# Altium PCB QuadraticConverterPCB.PcbDoc
Units mil, origin at the board's own origin, x right, y up, seen from the top; angles counter-clockwise.
Board outline 6560 x 5010 mil, 2 copper layers (Top Layer, Bottom Layer); 25 components, 8 nets, 94 pads, 0 vias.
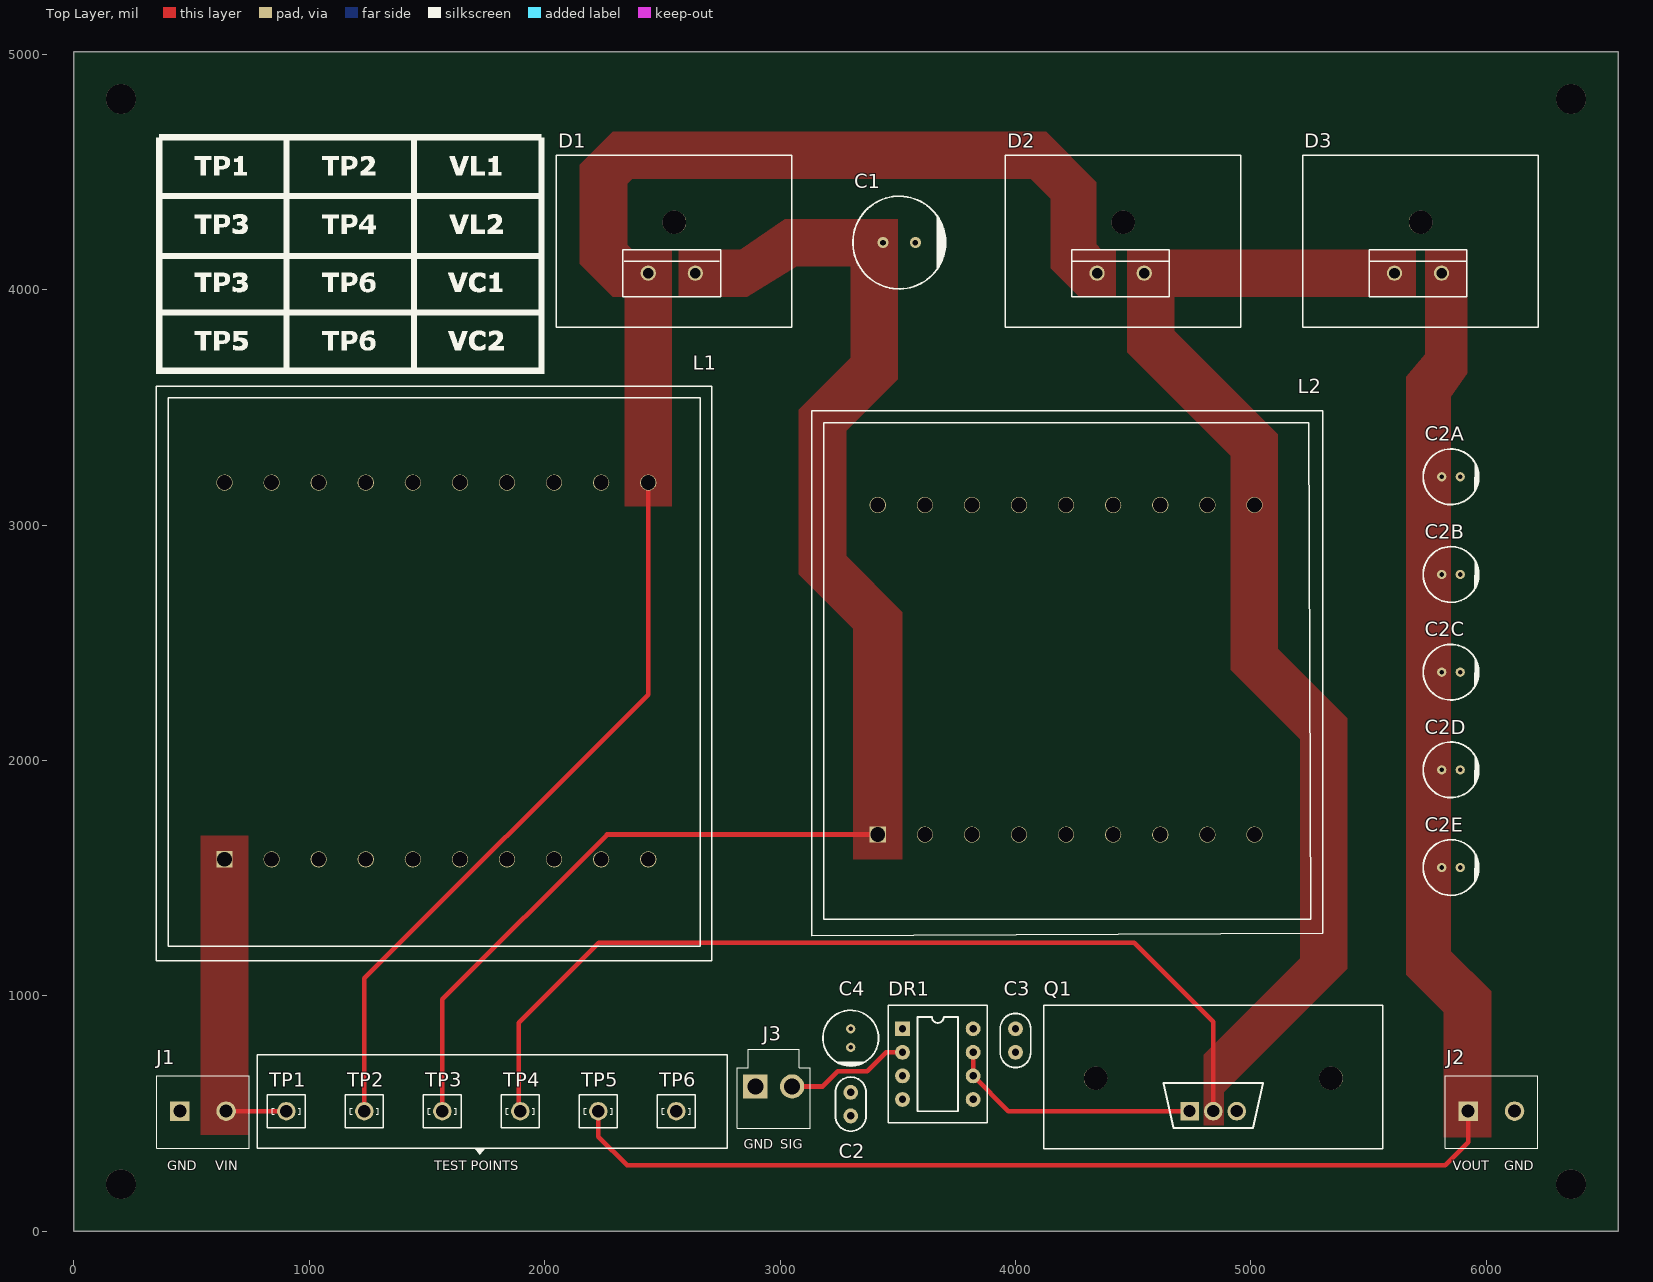
[diagram p0: Top Layer view]
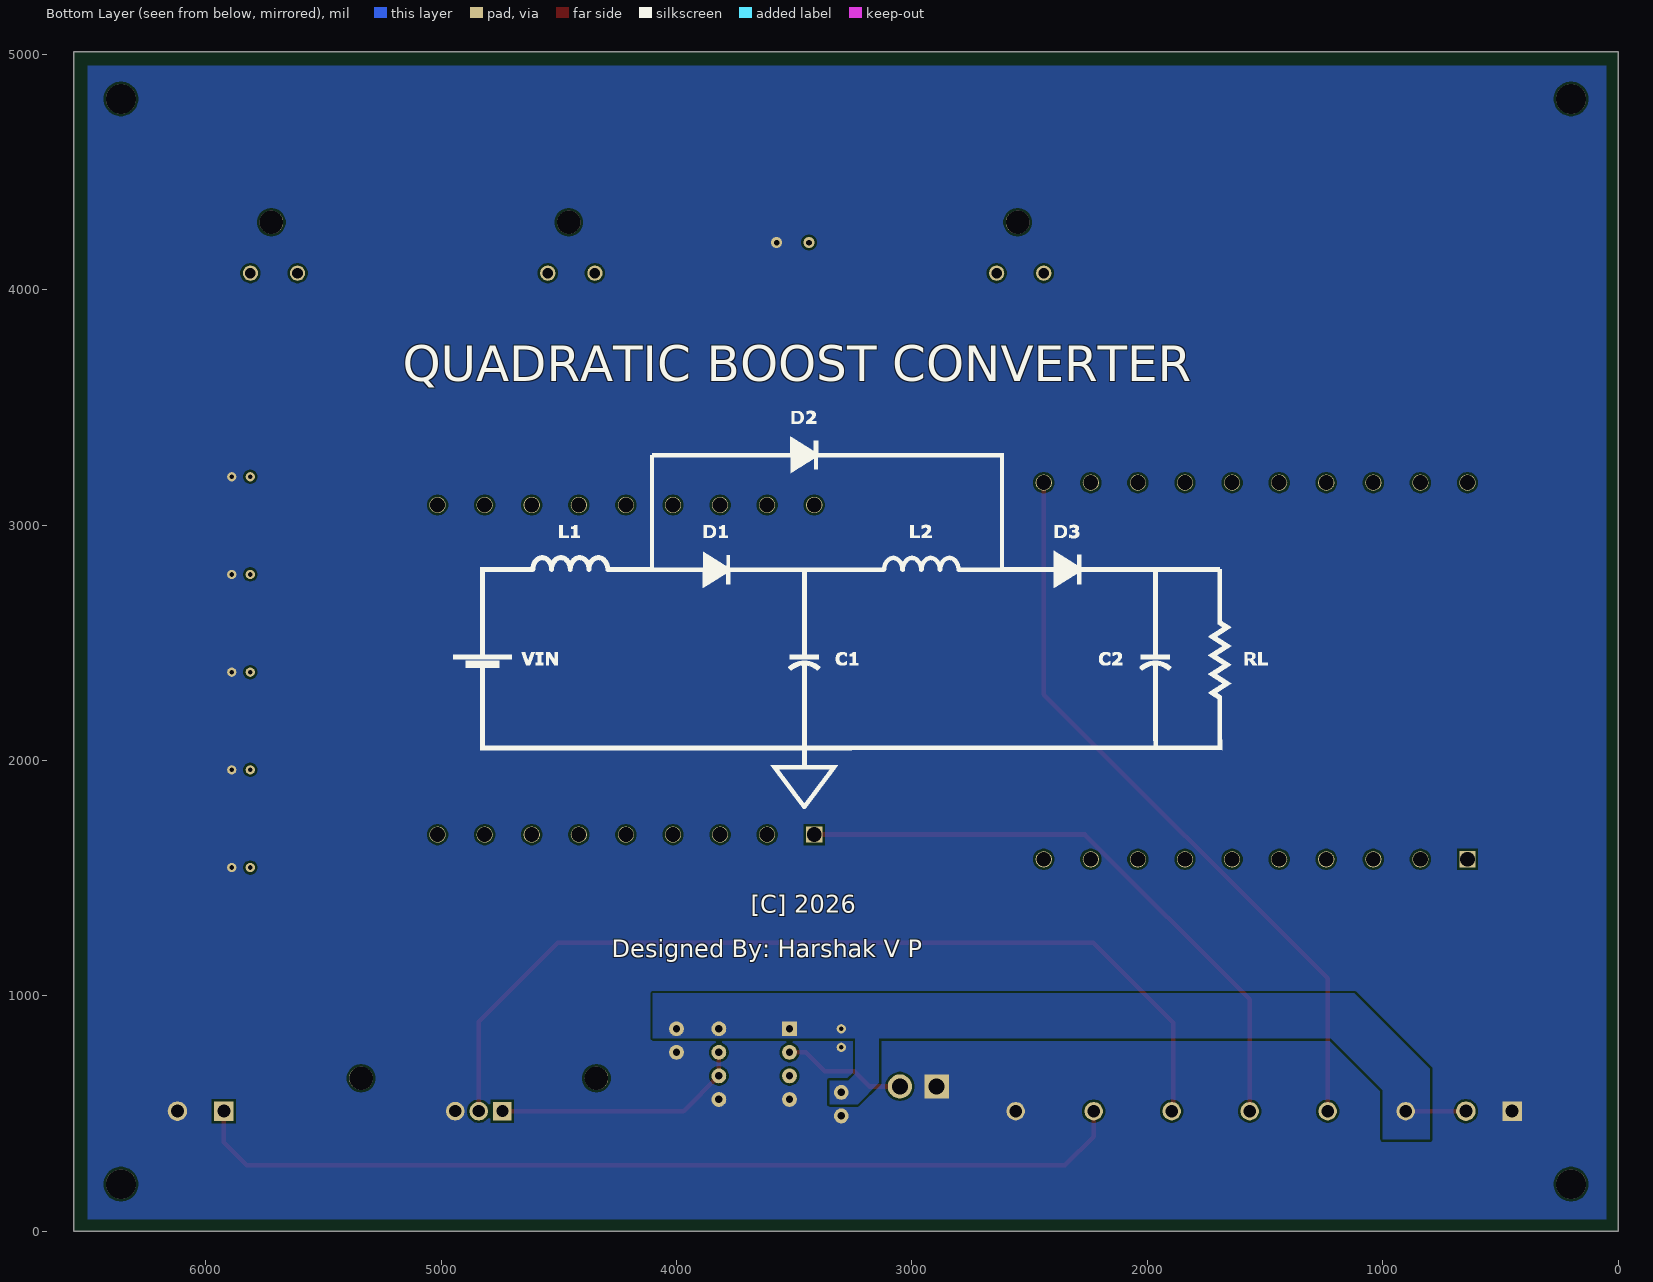
[diagram p1: Bottom Layer view, seen from below]
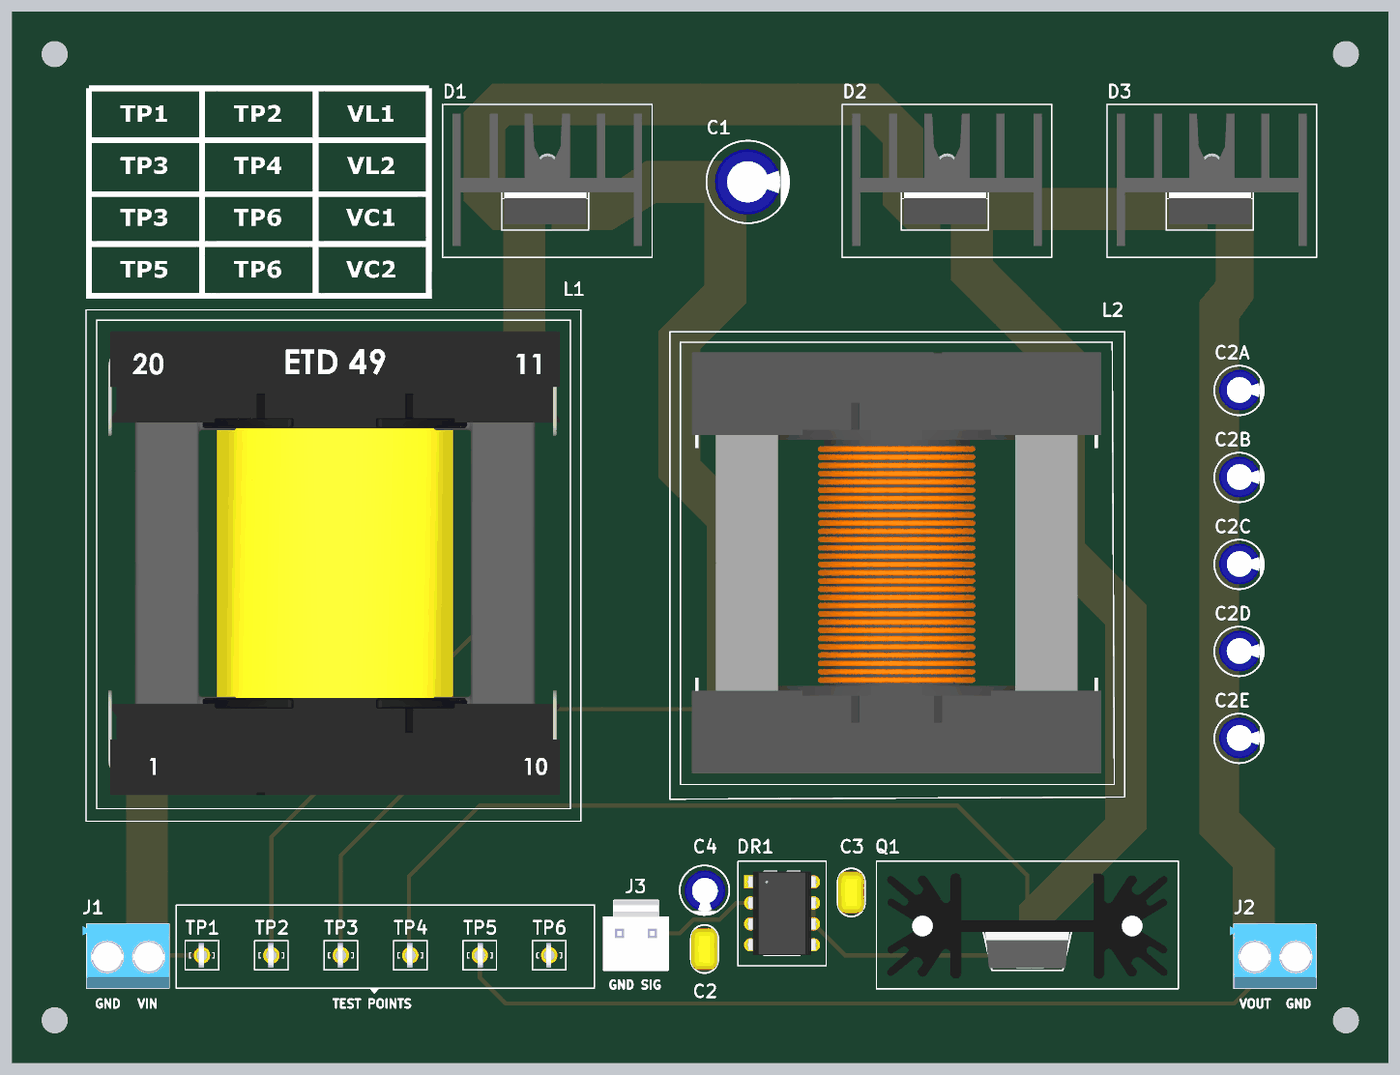
[diagram p2: 3D render of the assembled board from above, using the file's embedded part models]

## Layer stack, top to bottom
Top Solder: solder mask 0.4, Solder Resist, Dk 3.5
Top Layer: signal copper 1.4
Dielectric 1: dielectric 12.6, FR-4, Dk 4.8
Bottom Layer: signal copper 1.4
Bottom Solder: solder mask 0.4, Solder Resist, Dk 3.5

## Board outline
0,0 0,5010 6560,5010 6560,0

## Design rules (kind name [scope] priority, off if disabled: settings)
Clearance [All] p1: gap=10 ignorepadtopadclearanceinfootprint=FALSE
Height [All] p1: minheight=0 maxheight=5000 prefheight=2500
HoleSize [All] p1: absolutevalues=TRUE maxlimit=150 minlimit=1 maxpercent=80.000 minpercent=20.000
PolygonConnect [All] p1: connectstyle=Direct reliefconductorwidth=10 reliefentries=4 polygonreliefangle="90 Angle" airgapwidth=10
RoutingVias [All] p1: holewidth=28 width=50 viastyle="Through Hole" minholewidth=28 minwidth=50 maxholewidth=28 maxwidth=50
SolderMaskExpansion [All] p1: expansion=0 istentingtop=FALSE
SupplyNets "Schematic Supply Nets_1" [InNet('GND')] p1: voltage=0.000
SupplyNets "Schematic Supply Nets" [InNet('+12V')] p2: voltage=0.000
Width [All] p1: maxlimit=200 minlimit=10 preferedwidth=50
28 further rules are at their usual default settings.

## Classes and differential pairs
component class QuadraticConverterSch: C1 C2 C2A C2B C2C C2D C2E C3 C4 D1 D2 D3 DR1 J1 J2 J3 L1 L2 Q1 TP1 TP2 TP3 TP4

## Components (designator, comment, footprint, x,y, rotation, side; value= is the part's Value field where it differs from the comment)
C1 "100uF, 50V" CAP_G3 3575,4200 r180 top locked
C2 "0.1uF, 25V" CAP_CER 3300,490 r90 top locked value=100nF
C2A "22uF, 50V" CAP_C3 5850,3205 r180 top locked value=22µF
C2B "22uF, 50V" CAP_C3 5850,2790 r180 top locked value=22µF
C2C "22uF, 50V" CAP_C3 5850,2375 r180 top locked value=22µF
C2D "22uF, 50V" CAP_C3 5850,1960 r180 top locked value=22µF
C2E "22uF, 50V" CAP_C3 5850,1545 r180 top locked value=22µF
C3 "0.1uF, 25V" CAP_CER 4000,760 r90 top locked value=100nF
C4 "4.7uF, 16V" CAP_C3 3300,820.63 r90 top locked
D1 "100V, 15A" TO-220AC_ONS 2440,4070 r0 top locked
D2 "100V, 15A" TO-220AC_ONS 4346.67,4070 r0 top locked
D3 "100V, 15A" TO-220AC_ONS 5610,4070 r0 top locked
DR1 "TC4420EPA" TC4420EPA 3520,860 r0 top locked
J1 "TB003-500-P02BE" CUI_TB003-500-P02BE 450,510 r0 top
J2 "TB003-500-P02BE" CUI_TB003-500-P02BE 5923.15,510 r0 top locked
J3 "B2P-VH" JST_B2P-VH(LF)(SN) 2972.95,615 r0 top locked
L1 "B66368B1020T001" ETD49 640,1580 r90 top locked
L2 "B66368B1020T001" ETD44 3415,1685 r90 top locked
Q1 "100V, 57A" FP-PG-TO220-3-MFG 4740,510 r90 top locked value=23MΩ
TP1 "4952" KEYSTONE_4952 902.5,510 r0 top locked
TP2 "4952" KEYSTONE_4952 1233.82,510 r0 top locked
TP3 "4952" KEYSTONE_4952 1565.13,510 r0 top locked
TP4 "4952" KEYSTONE_4952 1896.45,510 r0 top locked
TP5 "4952" KEYSTONE_4952 2227.77,510 r180 top locked
TP6 "4952" KEYSTONE_4952 2559.08,510 r0 top locked

## Footprints (in the part's own frame and the unit in brackets; to place one, negate y for a bottom-side part, rotate by r counter-clockwise, add the part's x,y. Pads: shape width x height; smd on the part's side, far side on the other; paste and mask are expansions set on the pad)
CAP_C3 [mm]
  round 1 hole 0.5: 1(-1,0) 2(1,0)
  silkscreen extent -3,-3 3,3, body extent -2.56,-2.55 2.43,2.45, height 12.5
CAP_CER [mm]
  round 1.6 hole 0.8: 1(0,0) 2(2.54,0)
  silkscreen extent -1.65,-1.65 4.19,1.65, body extent -1.27,-1.59 3.81,1.59, height 6.34
CAP_G3 [mm]
  round 1.2 hole 0.6: 1(0,0) 2(3.5,0)
  silkscreen extent -3.25,-5 6.75,5, body extent -2.25,-4 5.75,4, height 12.5
CUI_TB003-500-P02BE [mm]
  rect 2.1x2.1 / inner round 2.1 / far side rect 2.1x2.1 hole 1.4 mask+0.102: 1(0,0)
  round 2.1 hole 1.4 mask+0.102: 2(5,0)
  silkscreen extent -2.5,-4 7.5,3.8, body extent -2.96,-3.99 7.54,3.81, height 10.3
ETD44 [mm]
  rect 1.75x1.75 hole 1.6: 1(0,0)
  round 1.75 hole 1.6: 2(0,-5.08) 3(0,-10.16) 4(0,-15.24) 5(0,-20.32) 6(0,-25.4) 7(0,-30.48) 8(0,-35.56) 9(0,-40.64) 10(35.56,-40.64) 11(35.56,-35.56) 12(35.56,-30.48) 13(35.56,-25.4) 14(35.56,-20.32) 15(35.56,-15.24) 16(35.56,-10.16) 17(35.56,-5.08) 18(35.56,0)
  silkscreen extent -10.92,-48.01 45.72,7.11, body extent -7.77,-45.16 43.23,4.45, height 38.11
ETD49 [mm]
  rect 1.75x1.75 hole 1.6: 1(0,0)
  round 1.75 hole 1.6: 2(0,-5.08) 3(0,-10.16) 4(0,-15.24) 5(0,-20.32) 6(0,-25.4) 7(0,-30.48) 8(0,-35.56) 9(0,-40.64) 10(0,-45.72) 11(40.64,-45.72) 12(40.64,-40.64) 13(40.64,-35.56) 14(40.64,-30.48) 15(40.64,-25.4) 16(40.64,-20.32) 17(40.64,-15.24) 18(40.64,-10.16) 19(40.64,-5.08) 20(40.64,0)
  silkscreen extent -10.92,-52.58 51.05,7.37, body extent -7.77,-50.03 48.44,4.67, height 40.57
FP-PG-TO220-3-MFG [mm]
  rect 2x2 hole 1.3 paste-2539.97 mask+0: 1(0,0)
  round 2 hole 1.3 paste-2539.97 mask+0: 2(0,-2.54) 3(0,-5.08)
  round 2.54 hole 2.54 unplated: 4(3.556,-15.24) 5(3.556,10.16)
  silkscreen extent -4.06,-20.83 11.43,15.75, body extent -2.84,-19.55 9.95,14.47, height 63.51
JST_B2P-VH(LF)(SN) [mm]
  rect 2.625x2.625 / inner round 2.625 / far side rect 2.625x2.625 hole 1.75: 1(-1.98,0)
  round 2.625 hole 1.75: 2(1.98,0)
  silkscreen extent -3.93,-4.5 3.93,4, body extent -3.93,-4.5 3.93,4, height 10.9
KEYSTONE_4952 [mm]
  round 1.98 hole 1.32: TP(0,0)
  silkscreen extent -2.03,-1.78 2.03,1.78, body extent -0.38,-1.5 0.25,1.5, height 6.3
TC4420EPA [mm]
  rect 1.6x1.6 hole 0.8: 1(0,0)
  round 1.6 hole 0.8: 2(0,-2.54) 3(0,-5.08) 4(0,-7.62) 5(7.62,-7.62) 6(7.62,-5.08) 7(7.62,-2.54) 8(7.62,0)
  silkscreen extent -1.52,-10.16 9.14,2.54, body extent -0.25,-8.89 7.87,1.27, height 5.46
TO-220AC_ONS [mil]
  round 65 / inner round 60 / far side round 65 hole 45 paste-99999 mask+0: 1(0,0) 2(200,0)
  round 100 hole 100 unplated: 5(111,216)
  silkscreen extent -390,-230 610,500, body extent -343,-175 563,455, height 985

## Part data
C1: library part SK107M050AG3AAKPLP, "CAP ALUM 100UF 20% 50V RADIAL TH", Case/Package=Radial, Manufacturer="Yageo Group", Supplier Part Number=399-6105-ND, Tolerance=20%, Voltage Rating (DC)=50V, Category="Aluminum Electrolytic Capacitors", Manufacturer Part Number=SK107M050AG3AAKPLP, Pricing="1=0.35, 10=0.215, 50=0.1572, 100=0.1388, 500=0.10682, 1000=0.09673, 2500=0.08592, 5000=0.07933 (USD)", RoHS=Non-Compliant, Stock=14220, Supplier=DigiKey
C2 C3: library part C320C104J3G5TA, "CAP CER 0.1UF 25V C0G/NP0 RADIAL", Case/Package=Radial, Dielectric=C0G, Dielectric Material=Ceramic, Manufacturer="Yageo Group", Max Operating Temperature=125°C, Min Operating Temperature=-55°C, Supplier Part Number=C320C104J3G5TA-ND, Tolerance=5%, Voltage Rating (DC)=25V, Category="Ceramic Capacitors", China RoHS=Compliant, ComponentLink1Description=https://datasheet.octopart.com:443/C320C104J3G5TA-KEMET-datasheet-182049027.pdf?src-supplier=IHS, ComponentLink1URL=https://datasheet.octopart.com:443/C320C104J3G5TA-KEMET-datasheet-182049027.pdf?src-supplier=IHS, Height=5.84mm, Length=5.08mm, Lifecycle Status=Production, Manufacturer Part Number=C320C104J3G5TA, Mounting Technology="Through Hole", Number of Terminals=2, Packaging=Bulk, Pricing="1=0.95, 10=0.602, 50=0.4654, 100=0.4233, 500=0.35228, 1000=0.33033, 2500=0.30714, 5000=0.29317 (USD)", REACH SVHC=Yes, RoHS=Compliant, Stock=1448, Supplier=DigiKey, Terminal Pitch=2.54mm, Width=3.18mm
C2A C2B C2C C2D C2E: library part ESK226M050AC3FA, "CAP ALUM 22UF 20% 50V RADIAL TH", Case/Package=Radial, Leakage Current=11µA, Manufacturer="Yageo Group", Max Operating Temperature=85°C, Min Operating Temperature=-40°C, Ripple Current=100mA, Supplier Part Number=399-ESK226M050AC3FATB-ND, Tolerance=20%, Voltage Rating=50V, Category="Aluminum Electrolytic Capacitors", ComponentLink1Description=https://datasheet.octopart.com:443/ESK226M050AC3FA-KEMET-datasheet-182055911.pdf?src-supplier=IHS, ComponentLink1URL=https://datasheet.octopart.com:443/ESK226M050AC3FA-KEMET-datasheet-182055911.pdf?src-supplier=IHS, ComponentLink2Description=https://datasheet.octopart.com:443/ESK226M050AC3FA-KEMET-datasheet-130075539.pdf?src-supplier=Farnell, ComponentLink2URL=https://datasheet.octopart.com:443/ESK226M050AC3FA-KEMET-datasheet-130075539.pdf?src-supplier=Farnell, Diameter=5mm, Dissipation Factor=10%, Export Control Classification Number (ECCN) Code=EAR99, Harmonized Tariff Schedule (HTS) Code=8532.22.00.20, Height=11mm, Introduction Date=2012-10-10, Lead Pitch=5mm, Length=11mm, Lifecycle Status=Production, Manufacturer Part Number=ESK226M050AC3FA, Mounting Technology="Through Hole", Number of Terminals=2, Pricing="2000=0.04756, 4000=0.04333, 6000=0.04119, 10000=0.0388, 14000=0.0374, 20000=0.03605 (USD)", Radiation Hardening=No, REACH SVHC=Yes, RoHS=Compliant, Stock=7835, Supplier=DigiKey, Terminal Pitch=2mm, Termination=Radial, Voltage Rating (DC)=50V
C4: library part SK475M016AC3AAKPLP, "CAP ALUM 4.7UF 20% 16V RADIAL TH", Manufacturer="Yageo Group", Supplier Part Number=399-ESK475M016AC3AA-ND, Category=Capacitors, Manufacturer Part Number=SK475M016AC3AAKPLP, Pricing="1=0.2, 10=0.121, 50=0.0868, 100=0.0759, 500=0.05706, 1000=0.05109, 2500=0.04469, 5000=0.04078 (USD)", Stock=38051, Supplier=DigiKey
D1 D2 D3: library part MUR1520G, "DIODE STANDARD 200V 15A TO2202", Average Rectified Current=15A, Breakdown Voltage=200V, Case/Package=TO-220-2, Forward Voltage=1V, Manufacturer=onsemi, Manufacturer Lifecycle Status=ACTIVE, Max Forward Surge Current (Ifsm)=200A, Max Operating Temperature=175°C, Min Operating Temperature=-65°C, Peak Reverse Current=10µA, Supplier Part Number=MUR1520GOS-ND, Category="Rectifier Diodes", China RoHS=Non-Compliant, ComponentLink1Description=https://datasheet.octopart.com:443/MUR1520G-ON-Semiconductor-datasheet-11724209.pdf?src-supplier=Upverter, ComponentLink1URL=https://datasheet.octopart.com:443/MUR1520G-ON-Semiconductor-datasheet-11724209.pdf?src-supplier=Upverter, ComponentLink2Description=https://datasheet.octopart.com:443/MUR1520G-ON-Semiconductor-datasheet-555965.pdf?src-supplier=Upverter, ComponentLink2URL=https://datasheet.octopart.com:443/MUR1520G-ON-Semiconductor-datasheet-555965.pdf?src-supplier=Upverter, ComponentLink3Description=https://datasheet.octopart.com:443/MUR1520G-onsemi-datasheet-180964278.pdf?src-supplier=IHS, ComponentLink3URL=https://datasheet.octopart.com:443/MUR1520G-onsemi-datasheet-180964278.pdf?src-supplier=IHS, ComponentLink4Description=https://datasheet.octopart.com:443/MUR1520G-ON-Semiconductor-datasheet-42423355.pdf?src-supplier=onsemi, ComponentLink4URL=https://datasheet.octopart.com:443/MUR1520G-ON-Semiconductor-datasheet-42423355.pdf?src-supplier=onsemi, ComponentLink5Description=https://datasheet.octopart.com:443/MUR1520G-onsemi-datasheet-165623856.pdf?src-supplier=Newark, ComponentLink5URL=https://datasheet.octopart.com:443/MUR1520G-onsemi-datasheet-165623856.pdf?src-supplier=Newark, ComponentLink6Description=https://datasheet.octopart.com:443/MUR1520G-ON-Semiconductor-datasheet-21211048.pdf?src-supplier=Electro+Sonic, ComponentLink6URL=https://datasheet.octopart.com:443/MUR1520G-ON-Semiconductor-datasheet-21211048.pdf?src-supplier=Electro+Sonic, ComponentLink7Description=https://datasheet.octopart.com:443/MUR1520G-ON-Semiconductor-datasheet-14054755.pdf?src-supplier=iiiC, ComponentLink7URL=https://datasheet.octopart.com:443/MUR1520G-ON-Semiconductor-datasheet-14054755.pdf?src-supplier=iiiC, ComponentLink8Description=https://datasheet.octopart.com:443/MUR1520G-ON-Semiconductor-datasheet-9571269.pdf?src-supplier=RS+(Formerly+Allied+Electronics), ComponentLink8URL=https://datasheet.octopart.com:443/MUR1520G-ON-Semiconductor-datasheet-9571269.pdf?src-supplier=RS+(Formerly+Allied+Electronics), ComponentLink9Description=https://datasheet.octopart.com:443/MUR1520G-ON-Semiconductor-datasheet-7627526.pdf?src-supplier=Farnell, ComponentLink9URL=https://datasheet.octopart.com:443/MUR1520G-ON-Semiconductor-datasheet-7627526.pdf?src-supplier=Farnell, ComponentLink10Description=https://datasheet.octopart.com:443/MUR1520G-ON-Semiconductor-datasheet-8441531.pdf?src-supplier=Jameco+(USA), ComponentLink10URL=https://datasheet.octopart.com:443/MUR1520G-ON-Semiconductor-datasheet-8441531.pdf?src-supplier=Jameco+(USA), ComponentLink11Description=http://sigma.octopart.com:80/15540786/rohs_certificate/ON-Semiconductor-MUR1520G.pdf?src-supplier=Compliance+Statements, ComponentLink11URL=http://sigma.octopart.com:80/15540786/rohs_certificate/ON-Semiconductor-MUR1520G.pdf?src-supplier=Compliance+Statements, ComponentLink12Description=http://sigma.octopart.com:80/15680957/materials_sheet/ON-Semiconductor-MUR1520G.csv?src-supplier=Compliance+Statements, ComponentLink12URL=http://sigma.octopart.com:80/15680957/materials_sheet/ON-Semiconductor-MUR1520G.csv?src-supplier=Compliance+Statements, ComponentLink13Description=http://sigma.octopart.com:80/150620126/rohs_statement/ON-Semiconductor-MUR1520G.pdf?src-supplier=Compliance+Statements, ComponentLink13URL=http://sigma.octopart.com:80/150620126/rohs_statement/ON-Semiconductor-MUR1520G.pdf?src-supplier=Compliance+Statements, ComponentLink14Description=http://sigma.octopart.com:80/reach_statement/ON-Semiconductor-company-79.pdf?src-supplier=Compliance+Statements, ComponentLink14URL=http://sigma.octopart.com:80/reach_statement/ON-Semiconductor-company-79.pdf?src-supplier=Compliance+Statements, ComponentLink15Description=https://octopart.com:443/opatz8j6/c1?t=nt_GdgalfpOTzaWI7ooSredfzqB6ERBuWQiJbk27sNOQiFi2UUykZKCLTg_8AJU8vOyl0Z6-lA1IOIGVnNla633GCdxRaI8FqNM4p_QqzO77u5SPv-kBuN8S9R1qP1kntFUr0NBj3wgLTiEo0ltfRTRk3-m8hC6rBOPWQm9rIC7qbAIzBGY9xI7OF5uLdVcoejT1hvt5vD3sQuR5iwosmdghXKHvyZ8KOpfN0q1dfUwFFtv_P3rarqQqZMZjodj8Y17SuqAwV14et8d_cQUKk8ZQ0j94OefPwa4O_a4bdJ_F43H_t66x8xJRN7_6NkesPIxkdNds3dhLoBRhW0WTmNJG5myBDcO70Q&src-supplier=Compliance+Statements, ComponentLink15URL=https://octopart.com:443/opatz8j6/c1?t=nt_GdgalfpOTzaWI7ooSredfzqB6ERBuWQiJbk27sNOQiFi2UUykZKCLTg_8AJU8vOyl0Z6-lA1IOIGVnNla633GCdxRaI8FqNM4p_QqzO77u5SPv-kBuN8S9R1qP1kntFUr0NBj3wgLTiEo0ltfRTRk3-m8hC6rBOPWQm9rIC7qbAIzBGY9xI7OF5uLdVcoejT1hvt5vD3sQuR5iwosmdghXKHvyZ8KOpfN0q1dfUwFFtv_P3rarqQqZMZjodj8Y17SuqAwV14et8d_cQUKk8ZQ0j94OefPwa4O_a4bdJ_F43H_t66x8xJRN7_6NkesPIxkdNds3dhLoBRhW0WTmNJG5myBDcO70Q&src-supplier=Compliance+Statements, ComponentLink16Description=https://octopart.com:443/opatz8j6/c1?t=ObDvWLcOcBV6SK18OWCBN_Fzgrl2kjVkxJPnOso7YVKI6Bpibfs3Hkxu4loTLk37O5plQNQ8JhcCV1c5sAsowwvhgiEPheMSmu5i9VXjQYc7LjFJUWCzUFoeEaAjV7SQHu95bexkkenfZbwGIfHSpczXyh6z30q4p-VLEUsUlOc0_7-IsUtTlLR7aAAN9qG5GYN3XbpElLR67L8KuFMSkQFf94N3RdrK3odK857AU-rUZKnhOhLnFsNtkwSNNyktKUqOitdqwYO-n7msw0XDQRYfYe1AS5ii8G_jtGXkZ7xfLJVZKt5HWaaq3auLdGTk9VcQCZY-3_hJj7ka0TLYR8vFVpKapro-&src-supplier=Compliance+Statements, ComponentLink16URL=https://octopart.com:443/opatz8j6/c1?t=ObDvWLcOcBV6SK18OWCBN_Fzgrl2kjVkxJPnOso7YVKI6Bpibfs3Hkxu4loTLk37O5plQNQ8JhcCV1c5sAsowwvhgiEPheMSmu5i9VXjQYc7LjFJUWCzUFoeEaAjV7SQHu95bexkkenfZbwGIfHSpczXyh6z30q4p-VLEUsUlOc0_7-IsUtTlLR7aAAN9qG5GYN3XbpElLR67L8KuFMSkQFf94N3RdrK3odK857AU-rUZKnhOhLnFsNtkwSNNyktKUqOitdqwYO-n7msw0XDQRYfYe1AS5ii8G_jtGXkZ7xfLJVZKt5HWaaq3auLdGTk9VcQCZY-3_hJj7ka0TLYR8vFVpKapro-&src-supplier=Compliance+Statements, Contact Plating=Tin, Country of Origin="Mainland China", Current Rating=15A, Element Configuration=Single, Export Control Classification Number (ECCN) Code=EAR99, Forward Current=15A, Harmonized Tariff Schedule (HTS) Code=8541.10.00.80, Height=9.27mm, Introduction Date=1982-12-01, Lead Free="Lead Free", Length=10.29mm, Lifecycle Status=Production, Manufacturer Part Number=MUR1520G, Max Output current=15A, Max Repetitive Reverse Voltage (Vrrm)=200V, Max Reverse Voltage (DC)=200V, Max Surge Current=200A, Number of Elements=1, Number of Terminals=2, Output Current=15A, Peak Non-Repetitive Surge Current=200A, Pins=2, Polarity=Standard, Pricing="1=2.82, 50=1.3934, 100=1.2551, 500=1.01232, 1000=0.9343, 2000=0.86872, 5000=0.841 (USD)", Radiation Hardening=No, REACH SVHC=No, Recovery Time=35ns, Reverse Recovery Time=35ns, Reverse Standoff Voltage=200V, Reverse Voltage=200V, RoHS=Compliant, Schedule B="8541100080, 8541100080|8541100080|8541100080|8541100080|8541100080|8541100080|8541100080|8541100080|8541100080|8541100080|8541100080|8541100080|8541100080|8541100080|8541100080|8541100080|8541100080|8541100080|8541100080|8541100080|8541100080|8541100080|8541100080|85", Stock=23366, Supplier=DigiKey, Voltage Rating (DC)=200V, Weight=4.535924g, Width=4.82mm
DR1: "IC GATE DRVR LOW-SIDE 8DIP", Case/Package=PDIP, Input Bias Current=10µA, Manufacturer=Microchip, Manufacturer Lifecycle Status=REL, Max Operating Temperature=150°C, Max Output current=6A, Max Power Dissipation=730mW, Max Supply Current=1.5mA, Max Supply Voltage=18V, Min Operating Temperature=-40°C, Min Supply Voltage=4.5V, Nominal Supply Current=3mA, Supplier Part Number=TC4420EPA-ND, Category="Gate Drivers", ComponentLink1Description=https://datasheet.octopart.com:443/TC4420EPA-Microchip-datasheet-14710913.pdf?src-supplier=Microchip, ComponentLink1URL=https://datasheet.octopart.com:443/TC4420EPA-Microchip-datasheet-14710913.pdf?src-supplier=Microchip, ComponentLink2Description=https://datasheet.octopart.com:443/TC4420EPA-Microchip-datasheet-17724646.pdf?src-supplier=Microchip, ComponentLink2URL=https://datasheet.octopart.com:443/TC4420EPA-Microchip-datasheet-17724646.pdf?src-supplier=Microchip, ComponentLink3Description=https://datasheet.octopart.com:443/TC4420EPA-Microchip-datasheet-4888.pdf?src-supplier=Esaler+Electronic, ComponentLink3URL=https://datasheet.octopart.com:443/TC4420EPA-Microchip-datasheet-4888.pdf?src-supplier=Esaler+Electronic, ComponentLink4Description=https://datasheet.octopart.com:443/TC4420EPA-Microchip-datasheet-51278.pdf?src-supplier=element14, ComponentLink4URL=https://datasheet.octopart.com:443/TC4420EPA-Microchip-datasheet-51278.pdf?src-supplier=element14, ComponentLink5Description=https://datasheet.octopart.com:443/TC4420EPA-Microchip-datasheet-14156544.pdf?src-supplier=iiiC, ComponentLink5URL=https://datasheet.octopart.com:443/TC4420EPA-Microchip-datasheet-14156544.pdf?src-supplier=iiiC, ComponentLink6Description=http://sigma.octopart.com:80/188449171/materials_sheet/Microchip-TC4420EPA.pdf?src-supplier=Compliance+Statements, ComponentLink6URL=http://sigma.octopart.com:80/188449171/materials_sheet/Microchip-TC4420EPA.pdf?src-supplier=Compliance+Statements, ComponentLink7Description=http://sigma.octopart.com:80/189109226/materials_sheet/Microchip-TC4420EPA.pdf?src-supplier=Compliance+Statements, ComponentLink7URL=http://sigma.octopart.com:80/189109226/materials_sheet/Microchip-TC4420EPA.pdf?src-supplier=Compliance+Statements, ComponentLink8Description=http://sigma.octopart.com:80/rohs_statement/Microchip-company-71.pdf?src-supplier=Compliance+Statements, ComponentLink8URL=http://sigma.octopart.com:80/rohs_statement/Microchip-company-71.pdf?src-supplier=Compliance+Statements, ComponentLink9Description=http://sigma.octopart.com:80/reach_statement/Microchip-company-70.pdf?src-supplier=Compliance+Statements, ComponentLink9URL=http://sigma.octopart.com:80/reach_statement/Microchip-company-70.pdf?src-supplier=Compliance+Statements, ComponentLink10Description=http://sigma.octopart.com:80/conflict_mineral_statement/Microchip-company-69.pdf?src-supplier=Compliance+Statements, ComponentLink10URL=http://sigma.octopart.com:80/conflict_mineral_statement/Microchip-company-69.pdf?src-supplier=Compliance+Statements, ComponentLink11Description=http://sigma.octopart.com:80/conflict_mineral_statement/Microchip-company-68.pdf?src-supplier=Compliance+Statements, ComponentLink11URL=http://sigma.octopart.com:80/conflict_mineral_statement/Microchip-company-68.pdf?src-supplier=Compliance+Statements, Country of Assembly=Thailand, Country of Fabrication="United States of America", Country of Origin=Thailand, Export Control Classification Number (ECCN) Code=EAR99, Fall Time=35ns, Harmonized Tariff Schedule (HTS) Code=8542.39.0060, Height=3.683mm, HS Code=8542.39.0090, Introduction Date=2002-01-01, Lead Free="Lead Free", Length=9.779mm, Lifecycle Status=Production, Manufacturer Part Number=TC4420EPA, Mounting Technology="Through Hole", Number of Channels=1, Number of Drivers=1, Number of Outputs=1, Output Current=6A, Output Voltage=18V, Packaging=Bulk, Pins=8, Power Dissipation=730mW, Pricing="1=2.02, 25=1.68, 100=1.53 (USD)", Projected EOL Date=2034-01-01, Propagation Delay=75ns, Radiation Hardening=No, REACH SVHC=No, RoHS=Compliant, Schedule B="8542390000, 8542390000|8542390000|8542390000|8542390000|8542390000|8542390000|8542390000|8542390000|8542390000|8542390000|8542390000|8542390000|8542390000|8542390000|8542390000|8542390000|8542390000|8542390000|8542390000|8542390000|8542390000|8542390000|8542390000|85", Stock=1439, Supplier=DigiKey, Turn-On Delay Time=75ns, Width=6.6mm
J1 J2: "TERMINAL BLOCK, SCREW TYPE, 5.00", Color=Blue, Current Rating=10A, Manufacturer="Same Sky", Max Operating Temperature=105°C, Min Operating Temperature=-40°C, Supplier Part Number=102-6161-ND, Voltage Rating=300V, Approvals="CE, EN, IEC, UL, cUL", Category="Terminal Blocks", ComponentLink1Description=https://datasheet.octopart.com:443/TB003-500-P02BE-Same-Sky-datasheet-181920252.pdf?src-supplier=Same+Sky, ComponentLink1URL=https://datasheet.octopart.com:443/TB003-500-P02BE-Same-Sky-datasheet-181920252.pdf?src-supplier=Same+Sky, ComponentLink2Description=https://datasheet.octopart.com:443/TB003-500-P02BE-CUI-Devices-datasheet-175928135.pdf?src-supplier=Same+Sky, ComponentLink2URL=https://datasheet.octopart.com:443/TB003-500-P02BE-CUI-Devices-datasheet-175928135.pdf?src-supplier=Same+Sky, ComponentLink3Description=https://datasheet.octopart.com:443/TB003-500-P02BE-CUI-Devices-datasheet-144794942.pdf?src-supplier=Same+Sky, ComponentLink3URL=https://datasheet.octopart.com:443/TB003-500-P02BE-CUI-Devices-datasheet-144794942.pdf?src-supplier=Same+Sky, ComponentLink4Description=https://datasheet.octopart.com:443/TB003-500-P02BE-CUI-Devices-datasheet-180438473.pdf?src-supplier=IHS, ComponentLink4URL=https://datasheet.octopart.com:443/TB003-500-P02BE-CUI-Devices-datasheet-180438473.pdf?src-supplier=IHS, ComponentLink5Description=https://datasheet.octopart.com:443/TB003-500-P02BE-Same-Sky-datasheet-182881442.pdf?src-supplier=Electro+Sonic, ComponentLink5URL=https://datasheet.octopart.com:443/TB003-500-P02BE-Same-Sky-datasheet-182881442.pdf?src-supplier=Electro+Sonic, ComponentLink6Description=https://datasheet.octopart.com:443/TB003-500-P02BE-CUI-Devices-datasheet-154730745.pdf?src-supplier=Electro+Sonic, ComponentLink6URL=https://datasheet.octopart.com:443/TB003-500-P02BE-CUI-Devices-datasheet-154730745.pdf?src-supplier=Electro+Sonic, ComponentLink7Description=https://datasheet.octopart.com:443/TB003-500-P02BE-CUI-Devices-datasheet-175927968.pdf?src-supplier=CUI+Devices+SCT, ComponentLink7URL=https://datasheet.octopart.com:443/TB003-500-P02BE-CUI-Devices-datasheet-175927968.pdf?src-supplier=CUI+Devices+SCT, ComponentLink8Description=https://datasheet.octopart.com:443/TB003-500-P02BE-CUI-Devices-datasheet-142371916.pdf?src-supplier=Future+Electronics, ComponentLink8URL=https://datasheet.octopart.com:443/TB003-500-P02BE-CUI-Devices-datasheet-142371916.pdf?src-supplier=Future+Electronics, ComponentLink9Description=https://datasheet.octopart.com:443/TB003-500-P02BE-Same-Sky-datasheet-182050248.pdf?src-supplier=Future+Electronics, ComponentLink9URL=https://datasheet.octopart.com:443/TB003-500-P02BE-Same-Sky-datasheet-182050248.pdf?src-supplier=Future+Electronics, ComponentLink10Description=https://datasheet.octopart.com:443/TB003-500-P02BE-CUI-Devices-datasheet-175928502.pdf?src-supplier=Future+Electronics, ComponentLink10URL=https://datasheet.octopart.com:443/TB003-500-P02BE-CUI-Devices-datasheet-175928502.pdf?src-supplier=Future+Electronics, ComponentLink11Description=https://datasheet.octopart.com:443/TB003-500-P02BE-CUI-Devices-datasheet-147843963.pdf?src-supplier=Future+Electronics, ComponentLink11URL=https://datasheet.octopart.com:443/TB003-500-P02BE-CUI-Devices-datasheet-147843963.pdf?src-supplier=Future+Electronics, ComponentLink12Description=https://datasheet.octopart.com:443/TB003-500-P02BE-Same-Sky-datasheet-192927514.pdf?src-supplier=Farnell, ComponentLink12URL=https://datasheet.octopart.com:443/TB003-500-P02BE-Same-Sky-datasheet-192927514.pdf?src-supplier=Farnell, ComponentLink13Description=https://datasheet.octopart.com:443/TB003-500-P02BE-Same-Sky-datasheet-189105712.pdf?src-supplier=Master+Electronics, ComponentLink13URL=https://datasheet.octopart.com:443/TB003-500-P02BE-Same-Sky-datasheet-189105712.pdf?src-supplier=Master+Electronics, ComponentLink14Description=https://octopart.com:443/opatz8j6/c1?t=pbRrR8Hown2rNkVW0S8igVE_zX_UDxh2yuhjoaL4SVF8qKqKIwCYm4Fz_63SpfVbHTSjgp2FPk7eWU64rwPfysKzEu6m9WTnDufD3WULoQj8qmTMYcw1T_Jxq8CgGgAeYbtumj8RnE-nQ44eRRASlAuXrEJAw0TDzeW2uga5hAVfbA7ekW4jmAHoRtmgp9LceGZscb2UZZ7RRGYE1eI9grKucljF36dHIQx6tfCRbX81GhsOrkIl40vqTJa7wb75IjU4gjKsmpf-ElFo98BWlHE7zezmoIdESkww1H-5lw78vaCadrJKZ8FFRghawO__SmUHA1yKaaBHUYuSk38crXBniFW9eiQJnXGsQpPoo9vx&src-supplier=Compliance+Statements, ComponentLink14URL=https://octopart.com:443/opatz8j6/c1?t=pbRrR8Hown2rNkVW0S8igVE_zX_UDxh2yuhjoaL4SVF8qKqKIwCYm4Fz_63SpfVbHTSjgp2FPk7eWU64rwPfysKzEu6m9WTnDufD3WULoQj8qmTMYcw1T_Jxq8CgGgAeYbtumj8RnE-nQ44eRRASlAuXrEJAw0TDzeW2uga5hAVfbA7ekW4jmAHoRtmgp9LceGZscb2UZZ7RRGYE1eI9grKucljF36dHIQx6tfCRbX81GhsOrkIl40vqTJa7wb75IjU4gjKsmpf-ElFo98BWlHE7zezmoIdESkww1H-5lw78vaCadrJKZ8FFRghawO__SmUHA1yKaaBHUYuSk38crXBniFW9eiQJnXGsQpPoo9vx&src-supplier=Compliance+Statements, ComponentLink15Description=https://octopart.com:443/opatz8j6/c1?t=-SNXZaHrxqMDz5PNpKBuJacicwKaO02awKHcIcFMFp2JeGq7ATnNAfO9H0ZZYbTaXiT1NlcIYD89FwSQil1u9-sg6zmUZUQ9zRnCq4qst7FeelPUsDTT-t78a2cmfQTZH6aEmsUCowfT9y4kgfgIwOg3z9HuT7VheZB6a42Y8HDteIjLSP3jqiKEvmfPagzurkHX6dmvJiZ5RVNXTMtylXKoEXILRr0yjg21icMTlobIgPTIsN01EXLtrTky1kQp6BHUt4BI7NuaUk30_EmRvpfCHb4hhPtwLLD3RyC-5BKOz8I3jvM7dRrdWYwbSAD4DyB2Giai_85phNPU5bK39QAOU1GizIxua7Ys8oA&src-supplier=Compliance+Statements, ComponentLink15URL=https://octopart.com:443/opatz8j6/c1?t=-SNXZaHrxqMDz5PNpKBuJacicwKaO02awKHcIcFMFp2JeGq7ATnNAfO9H0ZZYbTaXiT1NlcIYD89FwSQil1u9-sg6zmUZUQ9zRnCq4qst7FeelPUsDTT-t78a2cmfQTZH6aEmsUCowfT9y4kgfgIwOg3z9HuT7VheZB6a42Y8HDteIjLSP3jqiKEvmfPagzurkHX6dmvJiZ5RVNXTMtylXKoEXILRr0yjg21icMTlobIgPTIsN01EXLtrTky1kQp6BHUt4BI7NuaUk30_EmRvpfCHb4hhPtwLLD3RyC-5BKOz8I3jvM7dRrdWYwbSAD4DyB2Giai_85phNPU5bK39QAOU1GizIxua7Ys8oA&src-supplier=Compliance+Statements, ComponentLink16Description=https://octopart.com:443/opatz8j6/c1?t=jCDYcJYxeNP8z66HUgntQVBpJ9xIs-U1uKu0nCgoiP9aYHllnADfv7VacDL9eqwPAQzUPuYDwfQzXUd1BHed-BlME4xL6apKbrlLQ75a7iI9_Tz4hp6csKkIsjZDwQk4oX3PcUPzKOJYygpfFmJaIKX3dcvKCETBNvy2oqGLf2KePHH7skPGpsFA7EBnHAB9yNVcyzVjpArndLTNx6mUm64k7hE2xH58W5b1vPXIWhod6lNBGE83zJsaulFcpj3HKkDU9LJTWNw8dExn4YZUoeyNW73E3WI-P272TKcfCKK3bpOqj_xCdpNm2uWXk4BBaOnxahDtwfkNG8nUqAd1Ka9ZZnwbT9gRcXDfwDAikAOz&src-supplier=Compliance+Statements, ComponentLink16URL=https://octopart.com:443/opatz8j6/c1?t=jCDYcJYxeNP8z66HUgntQVBpJ9xIs-U1uKu0nCgoiP9aYHllnADfv7VacDL9eqwPAQzUPuYDwfQzXUd1BHed-BlME4xL6apKbrlLQ75a7iI9_Tz4hp6csKkIsjZDwQk4oX3PcUPzKOJYygpfFmJaIKX3dcvKCETBNvy2oqGLf2KePHH7skPGpsFA7EBnHAB9yNVcyzVjpArndLTNx6mUm64k7hE2xH58W5b1vPXIWhod6lNBGE83zJsaulFcpj3HKkDU9LJTWNw8dExn4YZUoeyNW73E3WI-P272TKcfCKK3bpOqj_xCdpNm2uWXk4BBaOnxahDtwfkNG8nUqAd1Ka9ZZnwbT9gRcXDfwDAikAOz&src-supplier=Compliance+Statements, ComponentLink17Description=https://octopart.com:443/opatz8j6/c1?t=e9oIxIL9DKrn39utCRXSP0WpfM9nAdP3aQXODQNq5gnh0tUJF51OfImLVmRYwI1FqOL_DduMCh2jkJIvB1ywDLDmMZ4txkECLEI70u0MdDNMlxoQH7430hIkMP_uqnfQ5EP4b96CSEXf5d5kCBV_Pb0PJJfInlwKI_aThFtIoDsc0eNEA62ZU_ZYO2EcCsVg5pXUHhNcolVLZnuEb9aL2rx4PRkAQQlbnSI2Mj7Cf4yKRzXWr2iqUzzKFVtZ87rkPRjL9qI6Rx3Ouc0FSVcN3d6_i9V8GC5bEv_0anDtTN5j0wsuLSq8MWO5Xw4Vxm1ihfYNLwPViD36gGtqLA2dEicNGExL7AnEs1GSHgo&src-supplier=Compliance+Statements, ComponentLink17URL=https://octopart.com:443/opatz8j6/c1?t=e9oIxIL9DKrn39utCRXSP0WpfM9nAdP3aQXODQNq5gnh0tUJF51OfImLVmRYwI1FqOL_DduMCh2jkJIvB1ywDLDmMZ4txkECLEI70u0MdDNMlxoQH7430hIkMP_uqnfQ5EP4b96CSEXf5d5kCBV_Pb0PJJfInlwKI_aThFtIoDsc0eNEA62ZU_ZYO2EcCsVg5pXUHhNcolVLZnuEb9aL2rx4PRkAQQlbnSI2Mj7Cf4yKRzXWr2iqUzzKFVtZ87rkPRjL9qI6Rx3Ouc0FSVcN3d6_i9V8GC5bEv_0anDtTN5j0wsuLSq8MWO5Xw4Vxm1ihfYNLwPViD36gGtqLA2dEicNGExL7AnEs1GSHgo&src-supplier=Compliance+Statements, Export Control Classification Number (ECCN) Code=EAR99, Harmonized Tariff Schedule (HTS) Code=8536.90.40.00, Height=10.3mm, Introduction Date=2020-04-29, Lifecycle Status=Production, Manufacturer Part Number=TB003-500-P02BE, Mounting Technology=Screw, Number of Contacts=2, Number of Levels=1, Number of Rows=1, Orientation=Horizontal, Pins=2, Pitch=5mm, Pricing="1=0.46, 10=0.345, 25=0.3008, 50=0.271, 100=0.2443, 250=0.21476, 500=0.19656, 1000=0.18166, 5000=0.15748 (USD)", REACH SVHC=Yes, RoHS=Compliant, Stock=17844, Supplier=DigiKey, Width=7.8mm, Wire/Cable Gauge=14AWG
J3: "CONN HEADER VERT 2POS 3.96MM", Color=Natural, Manufacturer=JST, Supplier Part Number=455-1639-ND, Category="Headers and Wire Housings", ComponentLink1Description=https://datasheet.octopart.com:443/B2P-VH-JST-datasheet-151658475.pdf?src-supplier=IHS, ComponentLink1URL=https://datasheet.octopart.com:443/B2P-VH-JST-datasheet-151658475.pdf?src-supplier=IHS, ComponentLink2Description=https://datasheet.octopart.com:443/B2P-VH-JST-datasheet-12510509.pdf?src-supplier=TME, ComponentLink2URL=https://datasheet.octopart.com:443/B2P-VH-JST-datasheet-12510509.pdf?src-supplier=TME, ComponentLink3Description=https://datasheet.octopart.com:443/B2P-VH-JST-datasheet-123795.pdf?src-supplier=DigiKey, ComponentLink3URL=https://datasheet.octopart.com:443/B2P-VH-JST-datasheet-123795.pdf?src-supplier=DigiKey, Connector Type="Male Pin", Contact Material=Brass, Contact Mating Length=7.6962mm, Contact Plating="Lead, Tin", Fastening Type=Friction, Gender=Male, Housing Color=Natural, Housing Material=Nylon, Lead Free="Contains Lead", Lead Pitch=3.96mm, Lifecycle Status=Obsolete, Manufacturer Part Number=B2P-VH, Mounting Technology="Through Hole", Number of Contacts=2, Number of Positions=2, Number of Rows=1, Orientation=Straight, Packaging=Bulk, Pins=2, Pitch=3.9624mm, Pricing="1=0.15, 10=0.132, 100=0.1117, 500=0.09968, 1000=0.09491, 5000=0.08471, 10000=0.08067 (USD)", RoHS=Compliant, Stock=25519, Supplier=DigiKey, Terminal Pitch=3.96mm, Termination=Solder
L1: "BOBBIN COIL FORMER ETD 49X25X16", Manufacturer=EPCOS, Supplier Part Number=495-5489-ND, Category=Transformers, ComponentLink1Description=https://datasheet.octopart.com:443/B66368B1020T001-EPCOS-datasheet-140090560.pdf?src-supplier=Ciiva, ComponentLink1URL=https://datasheet.octopart.com:443/B66368B1020T001-EPCOS-datasheet-140090560.pdf?src-supplier=Ciiva, ComponentLink2Description=https://datasheet.octopart.com:443/B66368B1020T001-EPCOS-datasheet-62119527.pdf?src-supplier=Newark, ComponentLink2URL=https://datasheet.octopart.com:443/B66368B1020T001-EPCOS-datasheet-62119527.pdf?src-supplier=Newark, ComponentLink3Description=https://datasheet.octopart.com:443/B66368B1020T001-EPCOS-datasheet-38086279.pdf?src-supplier=Newark, ComponentLink3URL=https://datasheet.octopart.com:443/B66368B1020T001-EPCOS-datasheet-38086279.pdf?src-supplier=Newark, ComponentLink4Description=https://datasheet.octopart.com:443/B66368B1020T001-EPCOS-datasheet-13702173.pdf?src-supplier=element14+APAC, ComponentLink4URL=https://datasheet.octopart.com:443/B66368B1020T001-EPCOS-datasheet-13702173.pdf?src-supplier=element14+APAC, ComponentLink5Description=https://datasheet.octopart.com:443/B66368B1020T001-EPCOS-datasheet-118216544.pdf?src-supplier=TME, ComponentLink5URL=https://datasheet.octopart.com:443/B66368B1020T001-EPCOS-datasheet-118216544.pdf?src-supplier=TME, Introduction Date=2022-10-10, Lifecycle Status=Production, Manufacturer Part Number=B66368B1020T001, Material=Plastic, Pins=20, Pricing="1=3.28, 10=2.256, 25=1.9196, 60=1.62833, 120=1.41583, 300=1.17707 (USD)", REACH SVHC=No, RoHS=Compliant, Stock=3903, Supplier=DigiKey
L2: library part B66366B1018T001, "BOBBIN COIL FORMER ETD 44X22X15", Manufacturer=EPCOS, Supplier Part Number=495-5481-ND, Category=Uncategorized, ComponentLink1Description=https://datasheet.octopart.com:443/B66366B1018T001-EPCOS-datasheet-140090559.pdf?src-supplier=Ciiva, ComponentLink1URL=https://datasheet.octopart.com:443/B66366B1018T001-EPCOS-datasheet-140090559.pdf?src-supplier=Ciiva, ComponentLink2Description=https://datasheet.octopart.com:443/B66366B1018T001-EPCOS-datasheet-62119526.pdf?src-supplier=Newark, ComponentLink2URL=https://datasheet.octopart.com:443/B66366B1018T001-EPCOS-datasheet-62119526.pdf?src-supplier=Newark, ComponentLink3Description=https://datasheet.octopart.com:443/B66366B1018T001-EPCOS-datasheet-38086269.pdf?src-supplier=Newark, ComponentLink3URL=https://datasheet.octopart.com:443/B66366B1018T001-EPCOS-datasheet-38086269.pdf?src-supplier=Newark, ComponentLink4Description=https://datasheet.octopart.com:443/B66366B1018T001-EPCOS-datasheet-11601330.pdf?src-supplier=element14+APAC, ComponentLink4URL=https://datasheet.octopart.com:443/B66366B1018T001-EPCOS-datasheet-11601330.pdf?src-supplier=element14+APAC, Lifecycle Status=Production, Manufacturer Part Number=B66366B1018T001, Material=PET, Pins=18, Pricing="1=3.51, 10=2.41, 25=2.0492, 50=1.799, 100=1.5667, 250=1.28364, 500=1.27316 (USD)", REACH SVHC=No, RoHS=Compliant, Stock=961, Supplier=DigiKey
Q1: library part IRF3710PBF, "MOSFET N-CH 100V 57A TO220AB", Case/Package=TO-220AB, Continuous Drain Current (ID)=57A, Drain to Source Breakdown Voltage=100V, Drain to Source Resistance=23mΩ, Gate to Source Voltage (Vgs)=20V, Input Capacitance=3.13nF, Manufacturer=Infineon, Max Junction Temperature (Tj)=175°C, Max Power Dissipation=150W, Min Operating Temperature=-55°C, Package Quantity=1000, Power Dissipation=200W, Supplier Part Number=IRF3710PBF-ND, Threshold Voltage=4V, Category=MOSFETs, ComponentLink1Description=https://datasheet.octopart.com:443/IRF3710PBF-Infineon-datasheet-165061528.pdf?src-supplier=element14+APAC, ComponentLink1URL=https://datasheet.octopart.com:443/IRF3710PBF-Infineon-datasheet-165061528.pdf?src-supplier=element14+APAC, ComponentLink2Description=https://datasheet.octopart.com:443/IRF3710PBF-Infineon-datasheet-10898114.pdf?src-supplier=Newark, ComponentLink2URL=https://datasheet.octopart.com:443/IRF3710PBF-Infineon-datasheet-10898114.pdf?src-supplier=Newark, ComponentLink3Description=https://datasheet.octopart.com:443/IRF3710PBF-Infineon-datasheet-8398991.pdf?src-supplier=IHS, ComponentLink3URL=https://datasheet.octopart.com:443/IRF3710PBF-Infineon-datasheet-8398991.pdf?src-supplier=IHS, ComponentLink4Description=https://datasheet.octopart.com/IRF3710PBF-Infineon-datasheet-8332893.pdf, ComponentLink4URL=https://datasheet.octopart.com/IRF3710PBF-Infineon-datasheet-8332893.pdf, ComponentLink5Description=https://datasheet.octopart.com:443/IRF3710PBF-Infineon-datasheet-6396635.pdf?src-supplier=Verical, ComponentLink5URL=https://datasheet.octopart.com:443/IRF3710PBF-Infineon-datasheet-6396635.pdf?src-supplier=Verical, ComponentLink6Description=https://datasheet.octopart.com:443/IRF3710PBF-International-Rectifier-datasheet-20347.pdf?src-supplier=Sierra+IC, ComponentLink6URL=https://datasheet.octopart.com:443/IRF3710PBF-International-Rectifier-datasheet-20347.pdf?src-supplier=Sierra+IC, ComponentLink7Description=https://datasheet.octopart.com:443/IRF3710PBF-International-Rectifier-datasheet-14061907.pdf?src-supplier=iiiC, ComponentLink7URL=https://datasheet.octopart.com:443/IRF3710PBF-International-Rectifier-datasheet-14061907.pdf?src-supplier=iiiC, ComponentLink8Description=https://datasheet.octopart.com:443/IRF3710-International-Rectifier-datasheet-10739949.pdf?src-supplier=iiiC, ComponentLink8URL=https://datasheet.octopart.com:443/IRF3710-International-Rectifier-datasheet-10739949.pdf?src-supplier=iiiC, ComponentLink9Description=https://datasheet.octopart.com:443/IRF3710PBF-Infineon-datasheet-9663198.pdf?src-supplier=RS+(Formerly+Allied+Electronics), ComponentLink9URL=https://datasheet.octopart.com:443/IRF3710PBF-Infineon-datasheet-9663198.pdf?src-supplier=RS+(Formerly+Allied+Electronics), ComponentLink10Description=https://datasheet.octopart.com:443/IRF3710-International-Rectifier-datasheet-14407.pdf?src-supplier=RS+(Formerly+Allied+Electronics), ComponentLink10URL=https://datasheet.octopart.com:443/IRF3710-International-Rectifier-datasheet-14407.pdf?src-supplier=RS+(Formerly+Allied+Electronics), ComponentLink11Description=https://datasheet.octopart.com:443/IRF3710PBF-International-Rectifier-datasheet-8209083.pdf?src-supplier=Jameco+(USA), ComponentLink11URL=https://datasheet.octopart.com:443/IRF3710PBF-International-Rectifier-datasheet-8209083.pdf?src-supplier=Jameco+(USA), ComponentLink12Description=https://datasheet.octopart.com:443/IRF3710PBF-International-Rectifier-datasheet-5334727.pdf?src-supplier=Farnell, ComponentLink12URL=https://datasheet.octopart.com:443/IRF3710PBF-International-Rectifier-datasheet-5334727.pdf?src-supplier=Farnell, ComponentLink13Description=https://datasheet.octopart.com:443/IRF3710PBF-International-Rectifier-datasheet-64300.pdf?src-supplier=DigiKey, ComponentLink13URL=https://datasheet.octopart.com:443/IRF3710PBF-International-Rectifier-datasheet-64300.pdf?src-supplier=DigiKey, ComponentLink14Description=http://sigma.octopart.com:80/conflict_mineral_statement/Infineon-company-51.pdf?src-supplier=Compliance+Statements, ComponentLink14URL=http://sigma.octopart.com:80/conflict_mineral_statement/Infineon-company-51.pdf?src-supplier=Compliance+Statements, ComponentLink15Description=http://sigma.octopart.com:80/reach_statement/International-Rectifier-company-55.pdf?src-supplier=Compliance+Statements, ComponentLink15URL=http://sigma.octopart.com:80/reach_statement/International-Rectifier-company-55.pdf?src-supplier=Compliance+Statements, ComponentLink16Description=http://sigma.octopart.com:80/rohs_statement/International-Rectifier-company-54.pdf?src-supplier=Compliance+Statements, ComponentLink16URL=http://sigma.octopart.com:80/rohs_statement/International-Rectifier-company-54.pdf?src-supplier=Compliance+Statements, Country of Origin="Mainland China", Current Rating=57A, Drain to Source Voltage (Vdss)=100V, Dual Supply Voltage=100V, Element Configuration=Single, Export Control Classification Number (ECCN) Code=EAR99, Fall Time=47ns, Harmonized Tariff Schedule (HTS) Code=8541.29.00.95, Height=19.8mm, Introduction Date=1997-07-15, Lead Free="Lead Free", Lead Pitch=2.54mm, Length=10.54mm, Lifecycle Status=Production, Manufacturer Part Number=IRF3710PBF, Max Operating Temperature=175°C, Min Breakdown Voltage=100V, Mounting Technology="Through Hole", Nominal Vgs=4V, Number of Channels=1, Number of Elements=1, Number of Terminals=3, On-State Resistance=23mΩ, Packaging=Bulk, Pins=3, Pricing="1=2.4, 10=1.537, 100=1.0446, 500=0.83386, 1000=0.76609, 2000=0.70911, 5000=0.64748, 10000=0.61425 (USD)", Radiation Hardening=No, Rds On Max=23mΩ, REACH SVHC=Yes, Recovery Time=220ns, Rise Time=58ns, RoHS=Compliant, Schedule B="8541290080, 8541290080|8541290080|8541290080|8541290080|8541290080|8541290080, 8541290080|8541290080|8541290080|8541290080|8541290080|8541290080|8541290080, 8541290080|8541290080|8541290080|8541290080|8541290080|8541290080|8541290080|8541290080|8541290080|8541290080|8541290080|8541290080|8541290080|8541290080|8541290080|8541290080", Stock=1406, Supplier=DigiKey, Termination="Through Hole", Turn-Off Delay Time=45ns, Turn-On Delay Time=12ns, Voltage Rating (DC)=100V, Width=4.69mm
TP1 TP2 TP3 TP4 TP5 TP6: "PC TEST POINT LOOP", Manufacturer=Keystone, Supplier Part Number=36-4952-ND, Body Material=Brass, Category="Test Points", ComponentLink1Description=https://datasheet.octopart.com:443/4952-Keystone-datasheet-180506708.pdf?src-supplier=IHS, ComponentLink1URL=https://datasheet.octopart.com:443/4952-Keystone-datasheet-180506708.pdf?src-supplier=IHS, ComponentLink2Description=https://datasheet.octopart.com:443/4952-Keystone-datasheet-15715008.pdf?src-supplier=Future+Electronics, ComponentLink2URL=https://datasheet.octopart.com:443/4952-Keystone-datasheet-15715008.pdf?src-supplier=Future+Electronics, ComponentLink3Description=https://datasheet.octopart.com:443/4952-Keystone-datasheet-110725615.pdf?src-supplier=Future+Electronics, ComponentLink3URL=https://datasheet.octopart.com:443/4952-Keystone-datasheet-110725615.pdf?src-supplier=Future+Electronics, ComponentLink4Description=https://datasheet.octopart.com:443/4952-Keystone-datasheet-15685916.pdf?src-supplier=Sager+Electronics, ComponentLink4URL=https://datasheet.octopart.com:443/4952-Keystone-datasheet-15685916.pdf?src-supplier=Sager+Electronics, ComponentLink5Description=https://datasheet.octopart.com:443/4952-Keystone-datasheet-9145.pdf?src-supplier=element14, ComponentLink5URL=https://datasheet.octopart.com:443/4952-Keystone-datasheet-9145.pdf?src-supplier=element14, ComponentLink6Description=https://datasheet.octopart.com:443/4952-Keystone-datasheet-66657057.pdf?src-supplier=TME, ComponentLink6URL=https://datasheet.octopart.com:443/4952-Keystone-datasheet-66657057.pdf?src-supplier=TME, ComponentLink7Description=https://datasheet.octopart.com:443/4952-Keystone-datasheet-50495.pdf?src-supplier=DigiKey, ComponentLink7URL=https://datasheet.octopart.com:443/4952-Keystone-datasheet-50495.pdf?src-supplier=DigiKey, Contact Material=Brass, Contact Plating=Tin, Country of Origin=USA, Export Control Classification Number (ECCN) Code=EAR99, Height=11.303mm, Hole Diameter=2.4892mm, Introduction Date=2009-07-02, Lead Free="Lead Free", Lifecycle Status=Production, Manufacturer Part Number=4952, Material=Brass, Packaging=Bulk, Pins=1, Pricing="1=0.25, 10=0.189, 25=0.1688, 100=0.1428, 500=0.11824, 1000=0.10924, 2500=0.1, 5000=0.09143 (USD)", REACH SVHC=Yes, RoHS=Compliant, Stock=87839, Supplier=DigiKey, Thickness=635µm, Width=2.9972mm

## Free pads (board coordinates)
  round 125.98 hole 125.98 unplated: 1(200,200) 1(200,4810) 1(6360,200) 1(6360,4810)

## Nets (pads, with @x,y where several pads share a name; then routed paths per layer and width w, separated by ;. In a path a pad name is that pad's centre, name@x,y a point inside that pad or via, vN(x,y) a via of type N, cw(c..) or ccw(c..) an arc to the next point about the centre after c; other vN are vias at no path point)
+12V: C2.2 C3.2 C4.2 DR1.1 DR1.8 J1.2 L1.1 TP1.TP | length 255.6
  Top Layer w20: J1.2 TP1.TP
GATE_SIG: DR1.6 DR1.7 Q1.1 | length 1082.1
  Top Layer w20: DR1.7 DR1.6 3970,510 Q1.1
GND: C1.1 C2.1 C2A.1 C2B.1 C2C.1 C2D.1 C2E.1 C3.1 C4.1 DR1.4 DR1.5 J1.1 J2.2 J3.1 Q1.3 TP6.TP
INPUT: DR1.2 J3.2 | length 529.2
  Top Layer w20: J3.2 3180.91,615 3245.91,680 3370,680 3450,760 DR1.2
NetC1_2: C1.2 D1.2 L2.1 TP3.TP | length 2614.9
  Top Layer w20: TP3.TP 1565.13,985.13 2265,1685 L2.1
NetC2A_2: C2A.2 C2B.2 C2C.2 C2D.2 C2E.2 D3.2 J2.1 TP5.TP | length 4026.3
  Top Layer w20: TP5.TP 2227.77,402.23 2350,280 5825,280 5923.15,378.15 J2.1
NetD1_1: D1.1 D2.1 L1.11 TP2.TP | length 3169.6
  Top Layer w20: TP2.TP 1233.82,1073.82 2440,2280 L1.11
NetD2_2: D2.2 D3.1 L2.10 Q1.2 TP4.TP | length 3987.3
  Top Layer w20: TP4.TP 1889.92,516.53 1889.92,884.92 2230,1225 4505,1225 4840,890 Q1.2
pads on no net: D1.5 D2.5 D3.5 DR1.3 L1.2 L1.3 L1.4 L1.5 L1.6 L1.7 L1.8 L1.9 L1.10 L1.12 L1.13 L1.14 L1.15 L1.16 L1.17 L1.18 L1.19 L1.20 L2.2 L2.3 L2.4 L2.5 L2.6 L2.7 L2.8 L2.9 L2.11 L2.12 L2.13 L2.14 L2.15 L2.16 L2.17 L2.18 Q1.4 Q1.5

## Polygon pours and split planes (outlines as drawn)
NetD2_2 on Top Layer "NETD2_2_L01_P009" (solid, remove dead copper, pour order 9): 4475,4170 4475,3735 4915,3295 4915,2385 5210,2090 5210,1160 4800,750 4800,590 4800,450 4885,450 4885,590 5410,1115 5410,2180 5115,2475 5115,3385 4675,3825 4675,4170
NetC1_2 on Top Layer "NETC1_2_L01_P006" (solid, remove dead copper, pour order 6): 3300,4300 3500,4300 3500,3620 3280,3400 3280,2870 3520,2630 3520,1580 3310,1580 3310,2560 3080,2790 3080,3490 3300,3710
NetC2A_2 on Top Layer "NETC2A_2_L01_P008" (solid, remove dead copper, pour order 8): 5740,4170 5920,4170 5920,3644 5850,3546 5850,1190 6020,1020 6020,400 5820,400 5820,930 5660,1090 5660,3630 5740,3726
NetD1_1 on Top Layer "NETD1_1_L01_P000" (solid, remove dead copper, pour order 0): 2371,4170 2350,4191 2350,4449 2371,4470 4018.36,4470 4065,4470 4150,4385 4150,4270 4150,4090 4270,3970 4425,3970 4425,4170 4365,4170 4343,4192 4343,4457 4130,4670 2290,4670 2150,4530 2150,4110 2290,3970 2540,3970 2540,4170
NetD2_2 on Top Layer "NETD2_2_L01_P007" (solid, remove dead copper, pour order 7): 4475,4170 4475,3970 5700,3970 5700,4170
NetD1_1 on Top Layer "NETD1_1_L01_P004" (solid, remove dead copper, pour order 4): 2340,4170 2540,4170 2540,3080 2340,3080
NetC1_2 on Top Layer "NETC1_2_L01_P002" (solid, remove dead copper, pour order 2): 2570,4170 2570,3970 2860,3970 3070,4100 3480,4100 3480,4300 3020,4300 2830,4170
+12V on Top Layer "+12V_L01_P003" (solid, remove dead copper, pour order 3): 540,1680 740,1680 740,410 540,410
GND on Bottom Layer "GND_L02_P013" (solid, remove dead copper, pour order 13): 50,4950 6500,4950 6500,50 50,50
+12V on Bottom Layer "+12V_L02_P012" (solid, remove dead copper, pour order 12): 800,390 1000,390 1000,600 1220,820 3110,820 3140,820 3140,630 3230,540 3350,540 3350,640 3270,640 3240,670 3240,820 4100,820 4100,1010 1120,1010 800,690

## Silkscreen, mask and mechanical layers (free items; w line width, h text height)
Top Overlay:
  drawing of 42 lines, arcs and shapes, not listed
  text "GND" at 2846.68,350.01 h40
  text "SIG" at 3000.02,350.01 h40
  text "GND" at 396.68,260.01 h40
  text "VIN" at 600.02,260.01 h40
  text "TEST POINTS" at 1530.07,260.01 h40
  text "VOUT" at 5856.69,260.01 h40
  text "GND" at 6076.68,260.01 h40
Bottom Overlay:
  drawing of 20 lines, arcs and shapes, not listed
  text "QUADRATIC BOOST CONVERTER" at 5161.91,3610.02 h150
  text "[C] 2026" at 3684.91,1352.51 h75
  text "Designed By: Harshak V P" at 4274.72,1165.01 h75
Board Shape:
  the board outline again, w6